# Altium PCB IMU_Breakout_Board.PcbDoc
Units mm, origin at the board's own origin, x right, y up, seen from the top; angles counter-clockwise.
Board outline 30 x 25 mm, 2 copper layers (Top Layer, Bottom Layer); 12 components, 7 nets, 55 pads, 13 vias.
Unrouted connection lines stored in the file: 1.
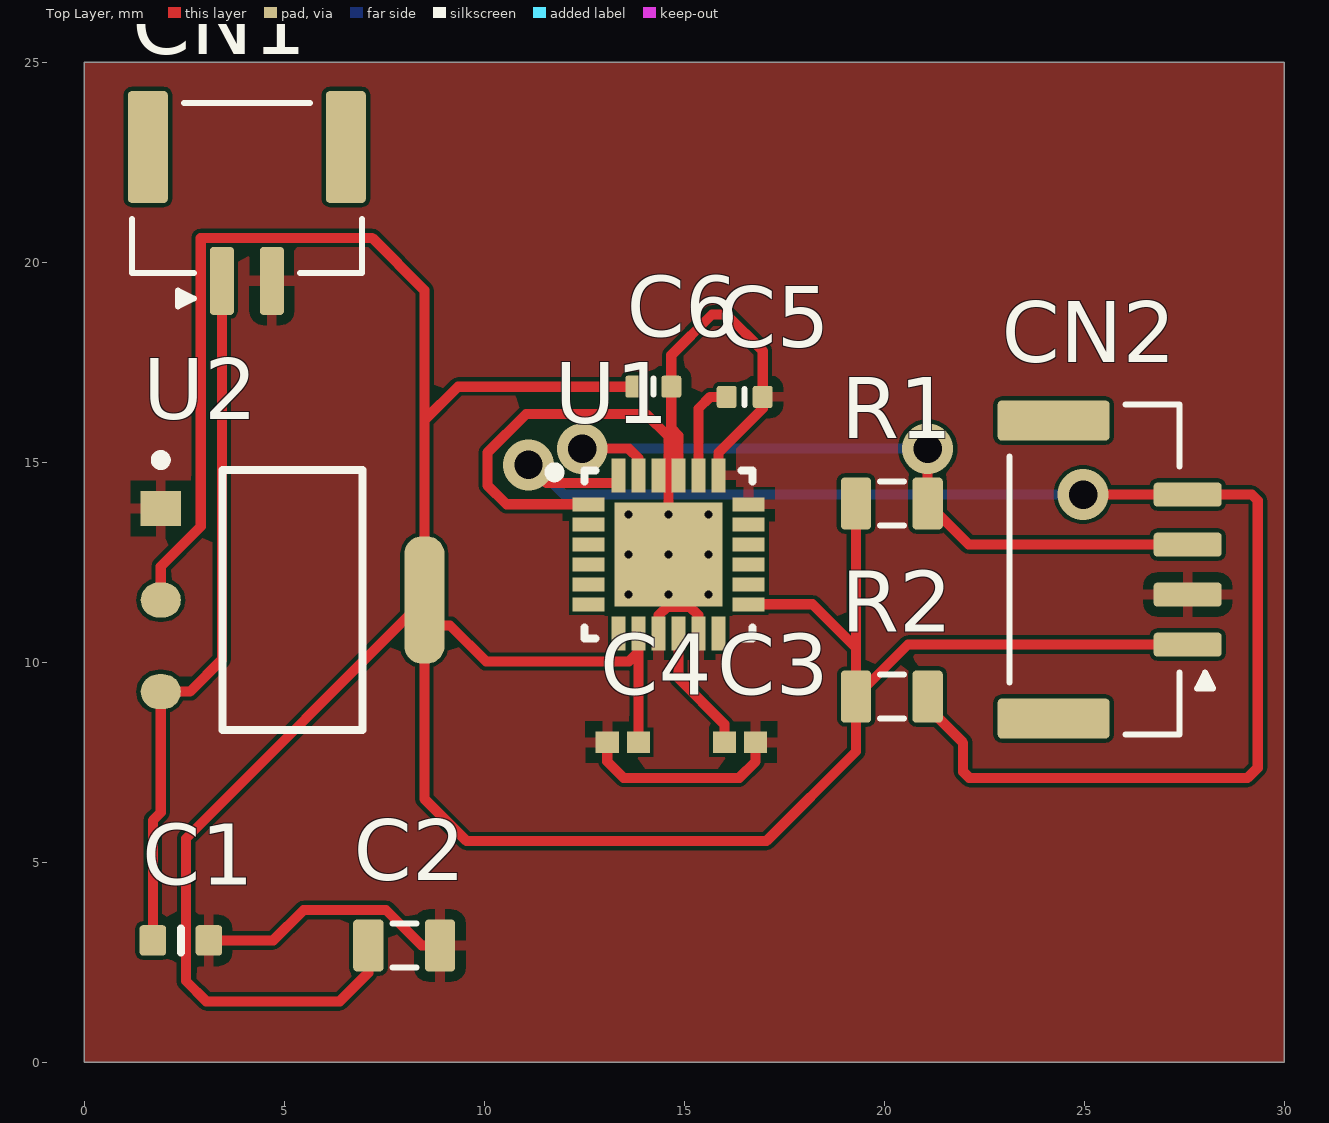
[diagram p0: Top Layer view]
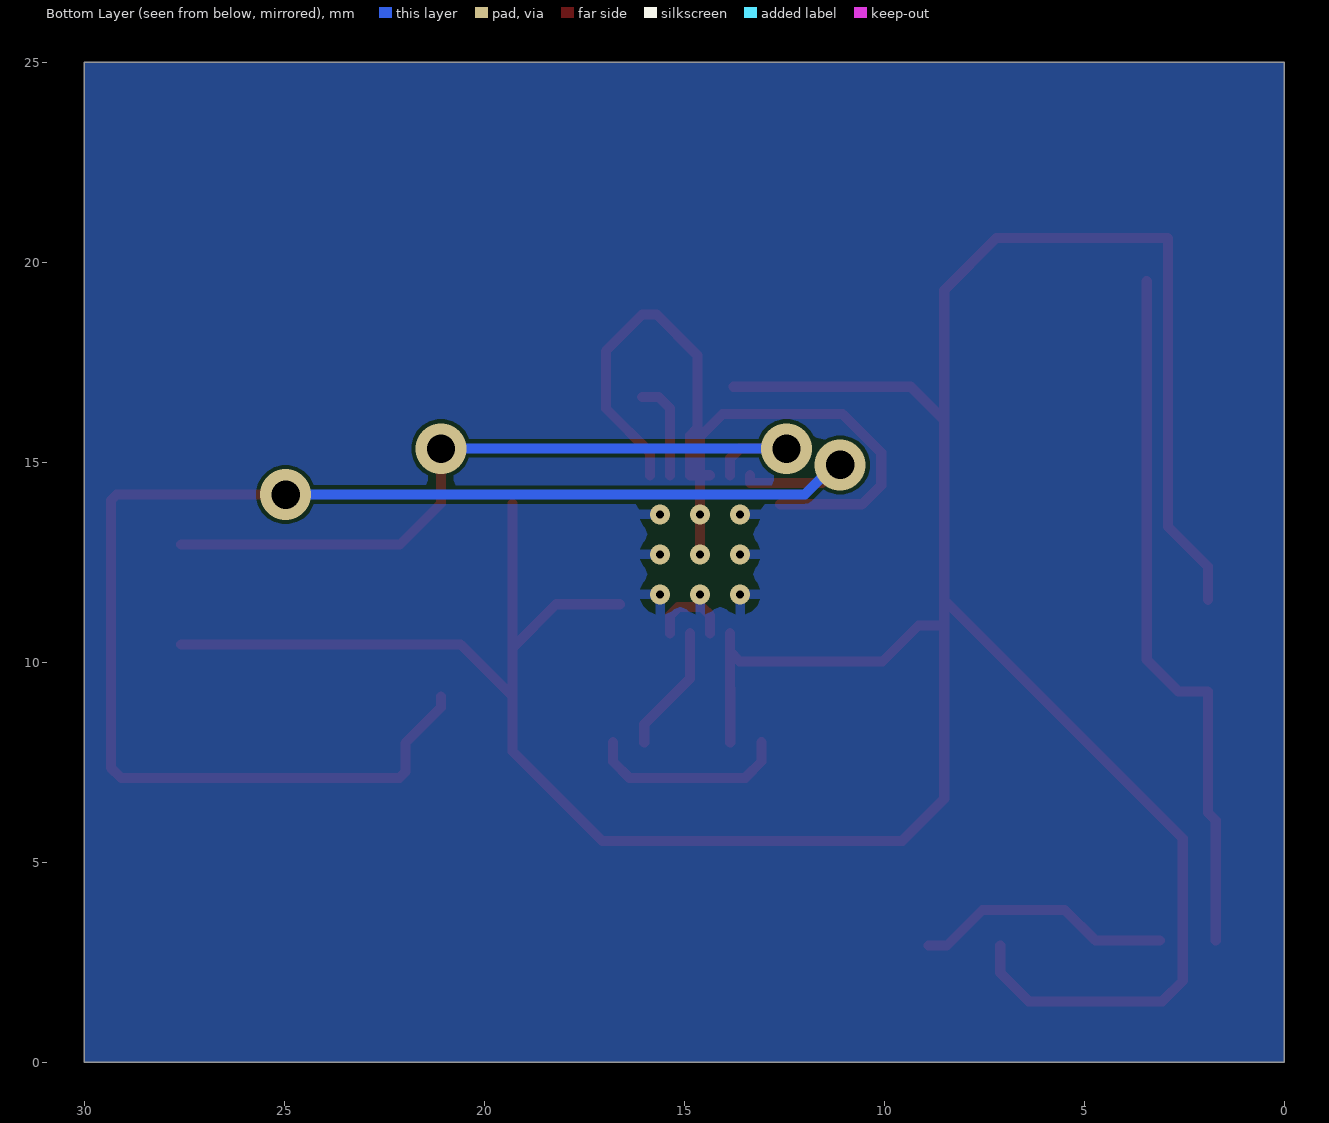
[diagram p1: Bottom Layer view, seen from below]
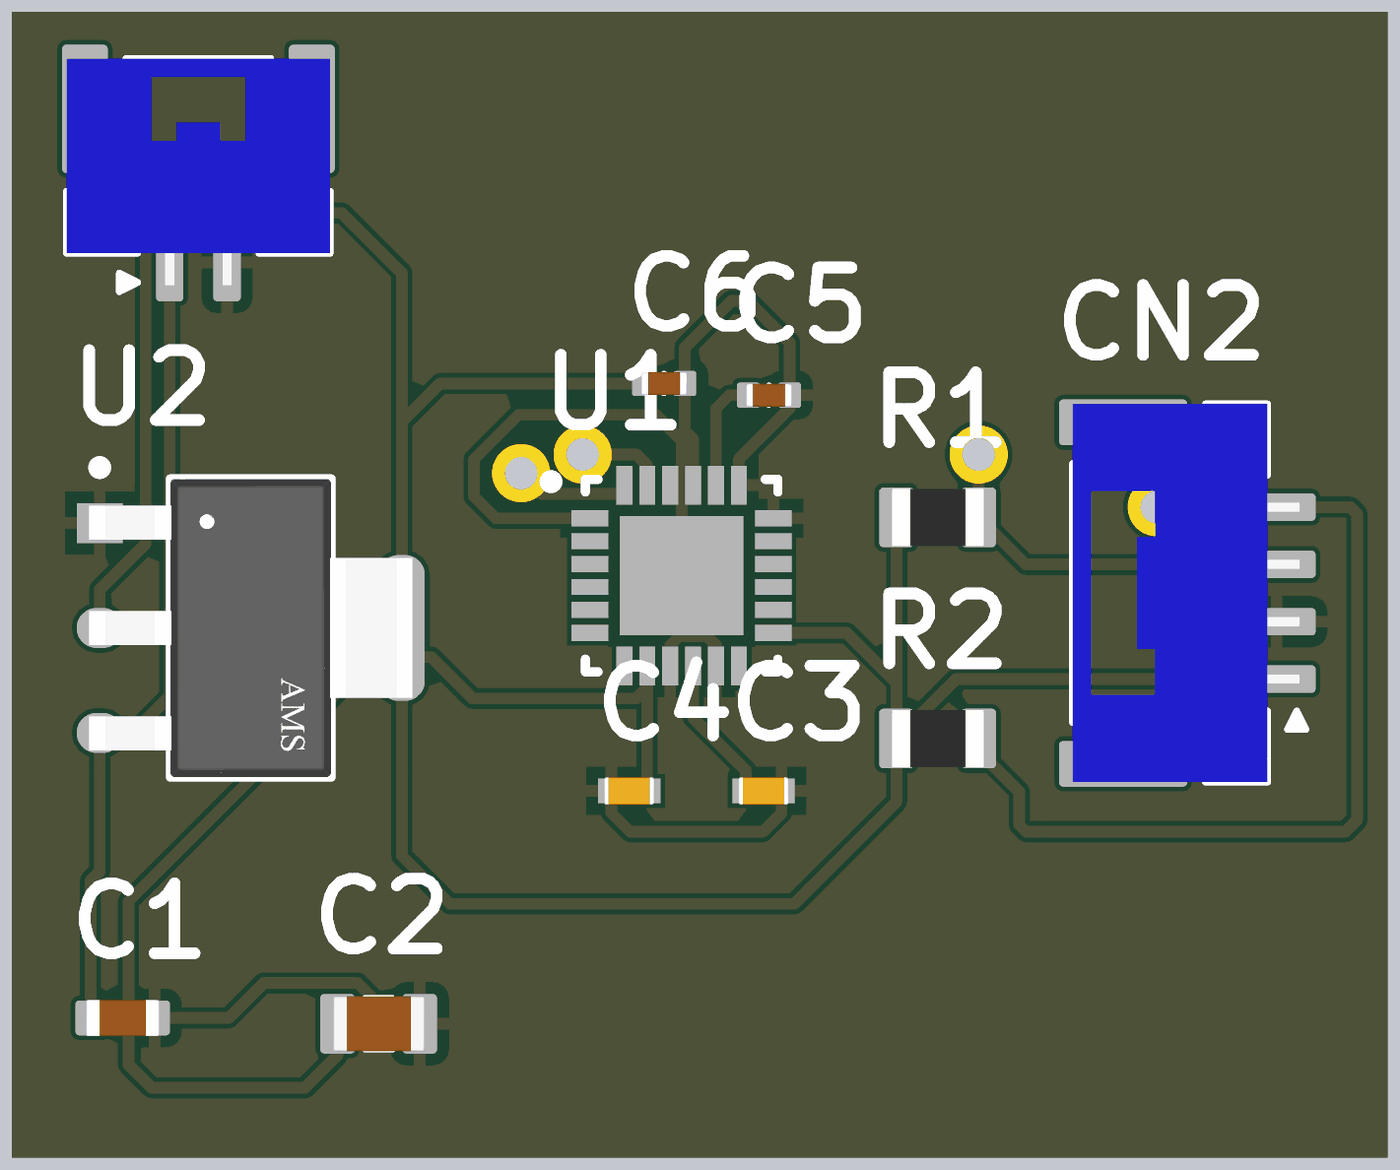
[diagram p2: 3D render of the assembled board from above, using the file's embedded part models]

## Layer stack, top to bottom
Top Solder: solder mask 0.0102, Solder Resist, Dk 3.5
Top Layer: signal copper 0.0356
Dielectric 1: dielectric 0.32, FR-4, Dk 4.8
Bottom Layer: signal copper 0.0356
Bottom Solder: solder mask 0.0102, Solder Resist, Dk 3.5

## Board outline
0,0 0,25 30,25 30,0

## Design rules (kind name [scope] priority, off if disabled: settings)
Clearance U1_Clearance [U1] p1: gap=0.1 ignorepadtopadclearanceinfootprint=TRUE
Clearance [All] p2: gap=0.1 ignorepadtopadclearanceinfootprint=TRUE
PolygonConnect [All] p1: connectstyle=Relief reliefconductorwidth=0.254 reliefentries=4 polygonreliefangle="90 Angle" airgapwidth=0.254
RoutingVias [All] p1: holewidth=0.711 width=1.27 viastyle="Through Hole" minholewidth=0.711 minwidth=1.27 maxholewidth=0.711 maxwidth=1.27
SolderMaskExpansion [All] p1: expansion=0 istentingtop=FALSE
SupplyNets "Schematic Supply Nets_2" [InNet('VCC/+5V')] p1: voltage=0.000
SupplyNets "Schematic Supply Nets_1" [InNet('GND')] p2: voltage=0.000
SupplyNets "Schematic Supply Nets" [InNet('+3.3V')] p3: voltage=0.000
Width [All] p1: maxlimit=0.254 minlimit=0.254 preferedwidth=0.254
30 further rules are at their usual default settings.

## Classes and differential pairs
component class IMU_Breakout_Schematic: C1 C2 C3 C4 C5 C6 CN1 CN2 R2 U1 U2

## Components (designator, comment, footprint, x,y, rotation, side; value= is the part's Value field where it differs from the comment)
C1 "Capacitor 10µF +/-20% 10V 0603" CAPC0603(1608)100_L 2.413,3.048 r0 top value=10µF
C2 "Capacitor 22µF +/-40% 16V 0805" CAPC0805(2012)145_L 8.001,2.921 r0 top value=22µF
C3 "Capacitor 0.1 uF +/- 5% 16 V 0402" CAPC1005X56X25LL10T15 16.392,8.001 r0 top value=100nF
C4 "Capacitor 0.1 uF +/- 5% 16 V 0402" CAPC1005X56X25LL10T15 13.462,8.001 r180 top value=100nF
C5 "Capacitor 2,2µF +/-20% 10V 0402" CAPC0402(1005)60_L 16.51,16.637 r0 top value=2.2nF
C6 "Capacitor 2,2µF +/-20% 10V 0402" CAPC0402(1005)60_L 14.224,16.891 r0 top value=10nF
CN1 "BM02B-GHS-TBT(LF)(SN)(N)" JST-BM02B-GHS-TBT_V 4.064,21.209 r0 top
CN2 "BM04B-GHS-TBT" JST-BM04B-GHS-TBT_V 25.908,12.319 r90 top
R1 "470R5J" RESC0805(2012)_L 20.193,13.97 r0 top value=4.7k
R2 "470R5J" RESC0805(2012)_L 20.193,9.144 r0 top value=4.7k
U1 "MPU6050" INSE-QFN-24_V 14.605,12.7 r0 top
U2 "AMS1117-3.3" FP-AMS1117-IPC_C 5.207,11.557 r0 top

## Footprints (in the part's own frame and the unit in brackets; to place one, negate y for a bottom-side part, rotate by r counter-clockwise, add the part's x,y. Pads: shape width x height; smd on the part's side, far side on the other; paste and mask are expansions set on the pad)
CAPC0402(1005)60_L [mm] "Chip Capacitor, Body 1.0x0.5mm, Height 0.6mm, IPC High Density"
  rrect25% 0.5x0.55 smd: 1(-0.45,0) 2(0.45,0)
  silkscreen extent 0,-0.2 0,0.2, body extent -0.5,-0.25 0.5,0.25, height 0.6
CAPC0603(1608)100_L [mm] "Chip Capacitor, Body 1.6x0.8mm, Height 1.0mm, IPC High Density"
  rrect25% 0.66x0.76 smd: 1(-0.7,0) 2(0.7,0)
  silkscreen extent 0,-0.3 0,0.3, body extent -0.8,-0.4 0.8,0.4, height 0.95
CAPC0805(2012)145_L [mm] "Chip Capacitor, Body 2.0x1.2mm, Height 1.45mm, IPC High Density"
  rrect25% 0.76x1.3 smd: 1(-0.9,0) 2(0.89,0)
  silkscreen extent -0.3,-0.55 0.3,0.55, body extent -1,-0.6 1,0.6, height 1.45
CAPC1005X56X25LL10T15 [mm] "Chip Capacitor, 2-Leads, Body 1.10x0.60mm, IPC High Density"
  rect 0.58x0.54 smd: 1(-0.39,0) 2(0.39,0)
  body extent -0.55,-0.3 0.55,0.3, height 0.56
FP-AMS1117-IPC_C [mm]
  rect 1.004x0.872 smd paste+0 mask+0: 1(-3.295,2.29)
  rrect100% 1.004x0.872 smd paste+0 mask+0: 2(-3.295,0) 3(-3.295,-2.29)
  rrect87% 1.004x3.182 smd paste+0 mask+0: 4(3.295,0)
  silkscreen extent -3.42,-3.25 1.75,3.62, body extent -3.9,-3.35 3.9,3.35, height 0.25
INSE-QFN-24_V [mm] "QFN, 24-Leads, Body 4.00x4.00mm, Pitch 0.50mm, Thermal Pad 2.7x2.6mm"
  rect 0.8x0.35 smd: 1(-2,1.25) 2(-2,0.75) 3(-2,0.25) 4(-2,-0.25) 5(-2,-0.75) 6(-2,-1.25) 13(2,-1.25) 14(2,-0.75) 15(2,-0.25) 16(2,0.25) 17(2,0.75) 18(2,1.25)
  rect 0.35x0.85 smd: 7(-1.25,-1.975) 8(-0.75,-1.975) 9(-0.25,-1.975) 10(0.25,-1.975) 11(0.75,-1.975) 12(1.25,-1.975) 19(1.25,1.975) 20(0.75,1.975) 21(0.25,1.975) 22(-0.25,1.975) 23(-0.75,1.975) 24(-1.25,1.975)
  rect 2.7x2.6 smd: 25(0,0)
  silkscreen extent -2.97,-2.1 2.1,2.17, body extent -2,-2 2,2, height 0.95
JST-BM02B-GHS-TBT_V [mm] "Connector, 2-Leads, Body 5.75x4.25mm, Pitch 1.25mm"
  rrect30% 0.6x1.7 smd: 1(-0.625,-1.675) 2(0.625,-1.675)
  rrect20% 1x2.8 smd: MP1(-2.475,1.675) MP2(2.475,1.675)
  silkscreen extent -2.88,-2.31 2.88,2.78, body extent -2.88,-2.18 2.87,2.77, height 4.21
JST-BM04B-GHS-TBT_V [mm] "Connector, 4-Leads, Body 8.25x4.25mm, Pitch 1.25mm"
  rrect30% 0.6x1.7 smd: 1(-1.875,-1.675) 2(-0.625,-1.675) 3(0.625,-1.675) 4(1.875,-1.675)
  rrect20% 1x2.8 smd: MP1(-3.725,1.675) MP2(3.725,1.675)
  silkscreen extent -4.13,-2.31 4.13,2.78, body extent -4.13,-2.18 4.12,2.77, height 4.21
RESC0805(2012)_L [mm] "Chip Resistor, Body 2.0x1.3mm, IPC High Density"
  rrect25% 0.76x1.3 smd: 1(-0.9,0) 2(0.89,0)
  silkscreen extent -0.3,-0.55 0.3,0.55, body extent -1,-0.62 1,0.63, height 0.6

## Part data
C1: library part CMP-001-00075-4, "Chip Capacitor, 10µF +/-20%, 10V, 0603, Thickness 1 mm", Case/Package=0603, Max Operating Temperature=85°C, Min Operating Temperature=-55°C, Tolerance=10%, Voltage Rating=10V, Mounting Technology=SMT, Pins=2
C2: library part CMP-001-00081-4, "Chip Capacitor, 22µF +/-40%, 16V, 0805, Thickness 1.45 mm", Case/Package=0805, Max Operating Temperature=85°C, Min Operating Temperature=-55°C, Tolerance=5%, Voltage Rating=16V, Mounting Technology=SMT, Pins=2
C3 C4: library part CMP-001-00001-6, "Chip Capacitor, 0.1 uF, +/- 5%, 16 V, 0402 (1005 Metric)", Capacitor Type=Ceramic, Case/Package=0402, Max Operating Temperature=125°C, Min Operating Temperature=-55°C, Tolerance=5%, Voltage Rating=16V, Mounting Technology=SM, Pins=2, RoHS Compliant=True
C5 C6: library part CMP-001-00056-4, "Chip Capacitor, 2,2µF +/-20%, 10V, 0402, Thickness 0.6 mm", Case/Package=0402, Max Operating Temperature=85°C, Min Operating Temperature=-55°C, Tolerance=10%, Voltage Rating=10V, Mounting Technology=SMT, Pins=2
CN1: library part CMP-002-00061-3, "Disconnectable Crimp Style Connector, Pitch 1.25 mm, 1 x 2 Position, Height 4.05 mm, -25 to 85 degC, RoHS, Tape and Reel", Case/Package="Disconnectable Crimp Style Connector, Pitch 1.25 mm, 1 x 2 Position, Height 4.05 mm", Connector Type=Header,Shrouded, Mounting Technology=SurfaceMount, Pins=4
CN2: library part CMP-002-00053-3, "Header, Pitch 1.25 mm, 1 x 4 Position, Height 4.05 mm, -25 to 85 degC", Pins=6
R1 R2: library part CMP-009-00102-2, "470R 0.125W 5% 0805 (2012 Metric)  SMD", Case/Package=0805, Power=125mW, Tolerance=5%, Mounting Technology=SMT, Pins=2
U1: library part CMP-010-00014-3, "3-Axis Gyroscope, 3-Axis Accelerometer, 2.375 to 3.46 V, -40 to 105 degC, 24-Pin QFN, RoHS, Tape and Reel", Case/Package=QFN, Manufacturer=InvenSense, Max Operating Temperature=85°C, Max Supply Voltage=3.6V, Min Operating Temperature=-40°C, Min Supply Voltage=2.5V, Package Description="24-Pin Quad Flat No-lead Package, Body 4 x 4 mm, Pitch 0.5 mm", Package Quantity=5000, Package Reference=QFN-24, Datasheet URL=https://datasheet.ciiva.com/1513/1788002-1513632.pdf, Datasheet Version="Rev. 3.4, 08/2013", Interface=I2C, Mounting Technology=SM, Packaging=CutTape, Pins=24, RoHS Compliant=True, Sensor Type=Motion
U2: library part CMP-209535-000001-1, "LDO Voltage Regulators 1A, 3.3V", Dropout Voltage=1.1V, Manufacturer="Advanced Monolithic Systems", Max Junction Temp=+125°C, Max Power Dissipation=1.2W, Max Supply Voltage=15V, Nominal Supply Current=5mA, Output Current=1A, Output Voltage=3.3V, Package=AMS1117, Temperature="-40°C to +125°C", Temperature Range Low=-40°C, Automotive=No, Category=IC, ComponentLink2Description=Datasheet, ComponentLink2URL=http://www.advanced-monolithic.com/pdf/ds1117.pdf, Device Class L1="Integrated Circuits (ICs)", Device Class L2="Power Management ICs", Device Class L3="Voltage Regulators - Linear", Height=1.8mm, Ipc Land Pattern Name=SOT229P700X180-4, Lead Free=Yes, Manufacturer Part Number=AMS1117-3.3, Number Of Outputs=1, Octopart=https://octopart.com/ams1117-3.3-advanced+monolithic+systems-25899300, Output Type=Fixed, RoHS=TRUE, Standoff Height=0.64mm, Temperature Range High=+125°C

## Via types
v1: diameter 0.5, hole 0.2, Top Layer to Bottom Layer, 9 vias
v2: diameter 1.27, hole 0.711, Top Layer to Bottom Layer, 4 vias

## Nets (pads, with @x,y where several pads share a name; then routed paths per layer and width w, separated by ;. In a path a pad name is that pad's centre, name@x,y a point inside that pad or via, vN(x,y) a via of type N, cw(c..) or ccw(c..) an arc to the next point about the centre after c; other vN are vias at no path point)
+3.3V: C2.1 C4.1 C6.1 CN2.1 R1.1 R2.1 U1.8 U1.13 U2.2 U2.4 | length 90.6
  Top Layer w0.254: U2.2 1.912,12.395 2.912,13.395 2.912,20.611 7.195,20.611 8.502,19.304 8.502,16.053 ; C2.1 7.101,2.235 6.39,1.524 3.048,1.524 2.54,2.032 2.54,5.595 U2.4 ; C6.1 9.34,16.891 8.502,16.053 ; C4.1 13.852,9.347 13.855,9.35 13.855,10.26 ; U1.8 13.855,10.26 ; U1.13 18.206,11.45 19.293,10.363 ; R1.1 19.293,10.363 ; CN2.1 20.593,10.444 R2.1 ; U2.4@8.502,10.922 9.144,10.922 10.046,10.02 13.614,10.02 13.855,10.26 ; U2.4@8.502,10.922 8.502,6.586 9.55,5.537 17.058,5.537 19.293,7.772 R2.1 ; U2.4@8.502,10.922 U2.4 ; U2.4 8.502,16.053 ; R2.1 19.293,10.363
CPOUT: C5.1 U1.20 | length 2.5
  Top Layer w0.254: U1.20 15.355,16.346 15.646,16.637 C5.1
GND: C1.2 C2.2 C3.2 C4.2 C5.2 C6.2 CN1.2 CN2.2 U1.1 U1.9 U1.11 U1.18 U1.19 U1.21 U1.22 U1.25 U2.1 | length 35.4
  Top Layer w0.254: C1.2 4.724,3.048 5.486,3.81 7.544,3.81 8.433,2.921 C2.2 ; U1.1 10.554,13.95 10.077,14.427 10.077,15.24 11.042,16.205 14.046,16.205 14.605,15.646 14.605,14.675 ; C4.2 13.072,7.518 13.478,7.112 16.376,7.112 16.782,7.518 C3.2 ; U1.9 14.355,11.176 14.558,11.379 15.152,11.379 15.355,11.176 U1.11 ; U1.22 14.605,14.675 ; v1(14.605,12.7) v1(14.605,13.7) 14.605,14.675 ; U1.19 15.855,15.24 16.96,16.345 C5.2 16.96,17.787 16.053,18.694 15.69,18.694 14.674,17.678 C6.2 14.674,15.853 14.855,15.672 U1.21 14.605,14.675
  other v1: 13.605,11.7 14.605,11.7 15.605,11.7 13.605,12.7 15.605,12.7 13.605,13.7 15.605,13.7
REGOUT: C3.1 U1.10 | length 3.2
  Top Layer w0.254: U1.10 14.855,9.601 16.002,8.454 C3.1
SCL: CN2.3 R1.2 U1.23 | length 18.9
  Top Layer w0.254: v2(12.446,15.342) 13.614,15.342 13.855,15.101 U1.23 ; v2(21.083,15.342) R1.2 22.109,12.944 CN2.3
  Bottom Layer w0.254: v2(12.446,15.342) v2(21.083,15.342)
SDA: CN2.4 R2.2 U1.24 | length 37.7
  Top Layer w0.254: v2(11.104,14.935) 11.56,14.48 13.355,14.48 U1.24 ; R2.2 21.083,8.874 21.971,7.986 21.971,7.261 22.12,7.112 29.083,7.112 29.337,7.366 29.337,14.045 29.188,14.194 v2(24.968,14.194)
  Bottom Layer w0.254: v2(11.104,14.935) 11.248,14.935 11.989,14.194 v2(24.968,14.194)
VCC/+5V: C1.1 CN1.1 U2.3 | length 17.6
  Top Layer w0.254: C1.1 1.713,6.045 1.912,6.244 U2.3 2.641,9.267 3.439,10.065 CN1.1
pads on no net: CN1.MP1 CN1.MP2 CN2.MP1 CN2.MP2 U1.2 U1.3 U1.4 U1.5 U1.6 U1.7 U1.12 U1.14 U1.15 U1.16 U1.17

## Polygon pours and split planes (outlines as drawn)
GND on Bottom Layer "GND_L02_P001" (solid, pour order 1): 0,0 30,0 30,25 0,25
GND on Top Layer "GND_L01_P000" (solid, pour order 0): 0,0 30,0 30,25 0,25

## Silkscreen, mask and mechanical layers (free items; w line width, h text height)
Mechanical 1:
  the board outline again, w0.254